# Altium PCB Tactile SW v2.0.PcbDoc
Units mm, origin at the board's own origin, x right, y up, seen from the top; angles counter-clockwise.
Board outline 17.5 x 15.4 mm, 2 copper layers (Top Layer, Bottom Layer), stack 1.569 mm thick; 8 components, 5 nets, 22 pads, 1 vias.
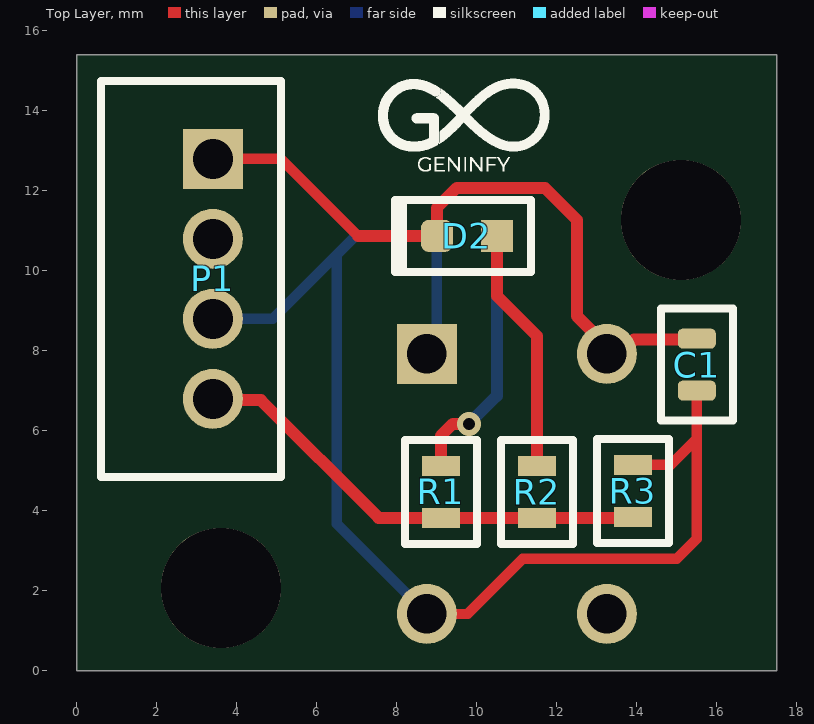
[diagram p0: Top Layer view]
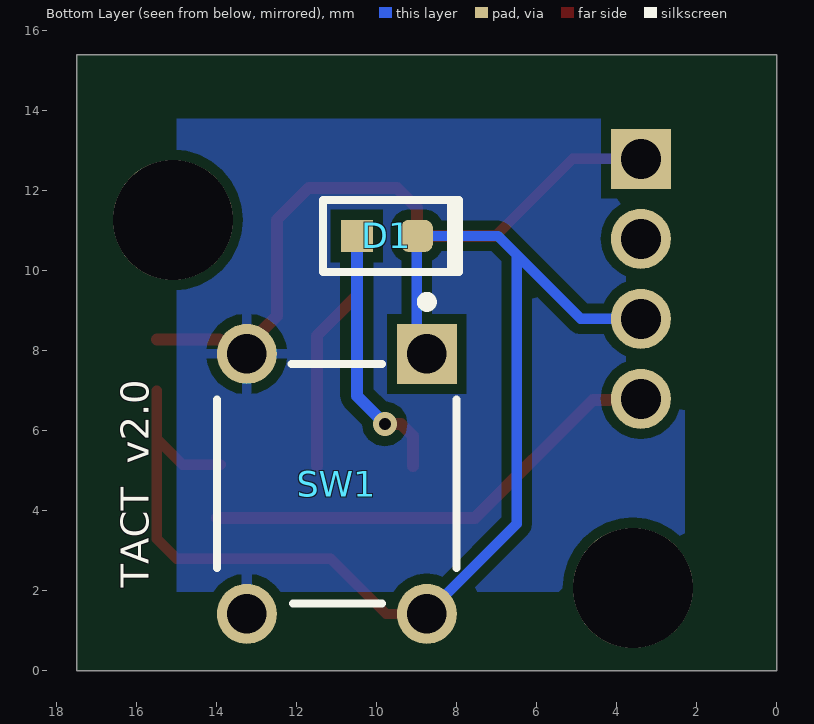
[diagram p1: Bottom Layer view, seen from below]
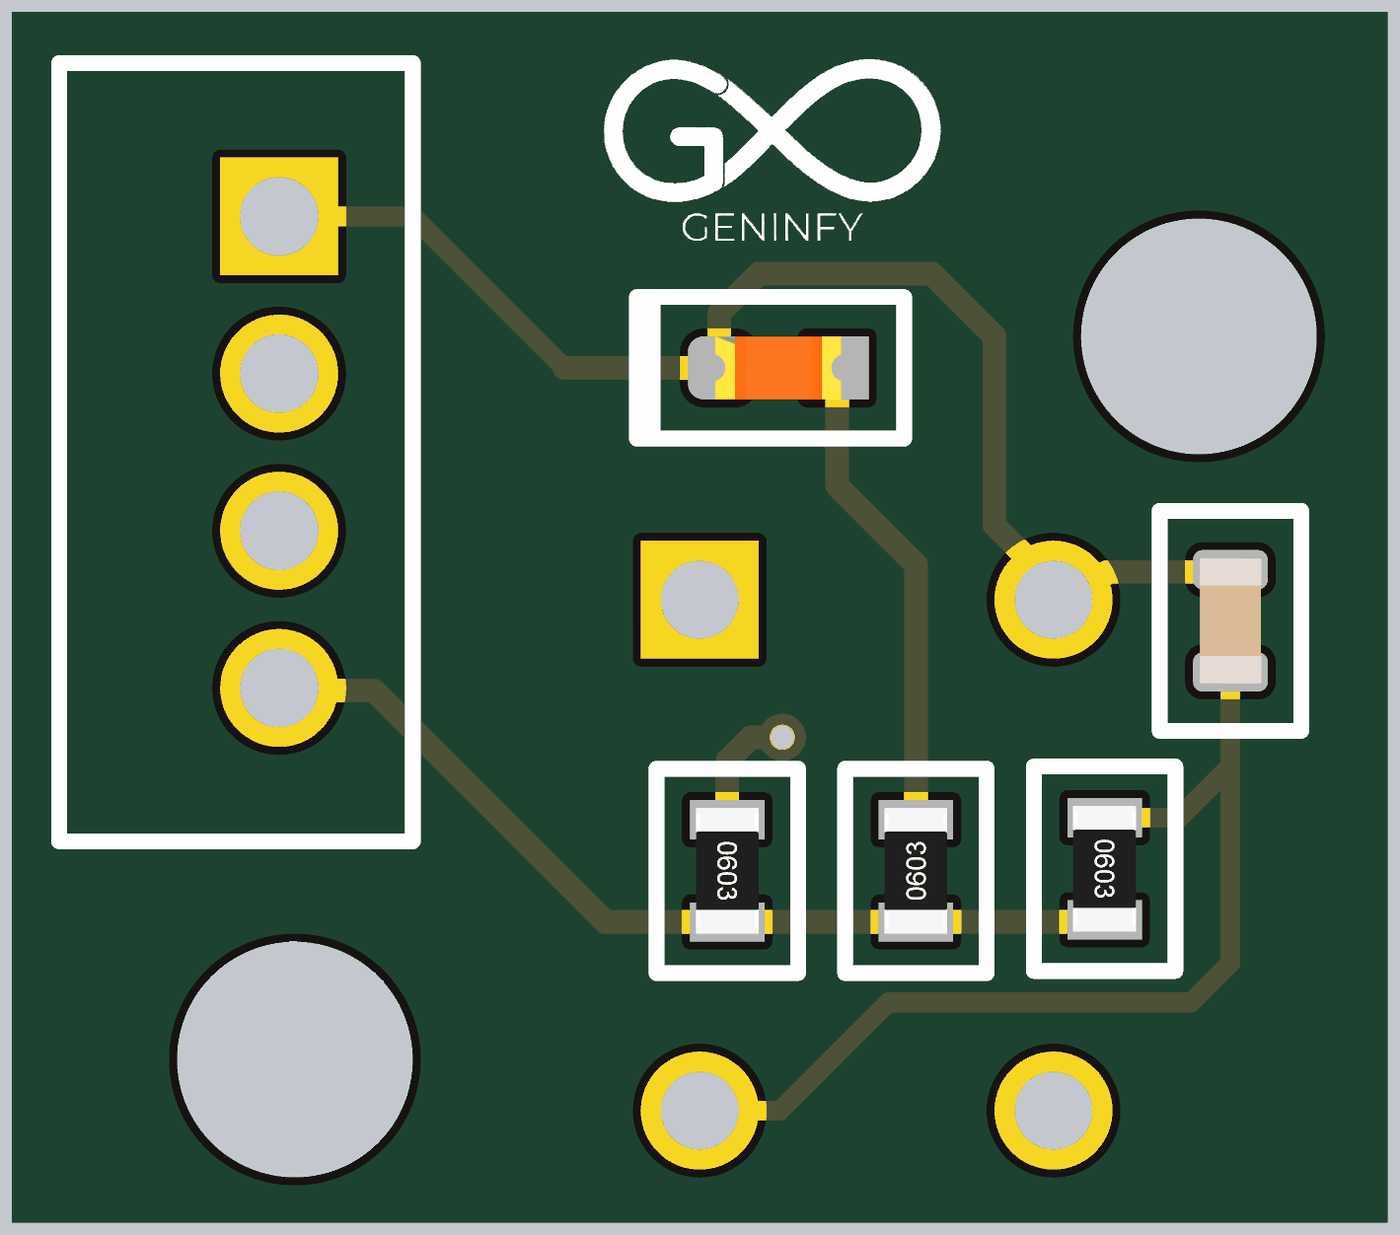
[diagram p2: 3D render of the assembled board from above, using the file's embedded part models]

## Layer stack, top to bottom
Top Solder: solder mask 0.0254, SM-001, Dk 4
Top Layer: signal copper 0.035
Dielectric 1: core 1.4986, Core-043, Dk 4.3
Bottom Layer: signal copper 0.035
Bottom Solder: solder mask 0.0254, SM-001, Dk 4

## Board outline
0,0 17.5,0 17.5,15.4 0,15.4

## Design rules (kind name [scope] priority, off if disabled: settings)
Clearance [All] p1: gap=0.254 ignorepadtopadclearanceinfootprint=FALSE except(0: Arc-Hole Track-Hole SMDPad-Hole THPad-Hole Via-Hole Fill-Hole Poly-Hole Region-Hole Text-Hole)
PolygonConnect [All] p1: connectstyle=Relief reliefconductorwidth=0.254 reliefentries=4 polygonreliefangle="90 Angle" airgapwidth=0.254
RoutingVias [All] p1: holewidth=0.711 width=1.27 viastyle="Through Hole" minholewidth=0.711 minwidth=1.27 maxholewidth=0.711 maxwidth=1.27
SolderMaskExpansion [All] p1: expansion=0.102 istentingtop=FALSE
Width [All] p1: maxlimit=1 minlimit=0.254 preferedwidth=0.254
30 further rules are at their usual default settings.

## Components (designator, comment, footprint, x,y, rotation, side; value= is the part's Value field where it differs from the comment)
C1 "0.1uF" "0.1uF 0603" 15.5,7.654 r270 top
D1 "LED - Orange" LED0603-Orange 9.75,10.873 r0 bottom
D2 "LED - Orange" LED0603-Orange 9.75,10.873 r0 top
P1 "B4B-PH-K-S(LF)(SN)" JST-B4B-PH-K-S_V 2.85,9.8 r270 top
R1 "68R" "68R 0603" 9.1,4.473 r270 top
R2 "68R" "68R 0603" 11.5,4.473 r90 top
R3 "10k" "10k R0603" 13.9,4.5 r270 top
SW1 "1825910-6" TECO-1825910-6_V 11,4.673 r270 bottom

## Footprints (in the part's own frame and the unit in brackets; to place one, negate y for a bottom-side part, rotate by r counter-clockwise, add the part's x,y. Pads: shape width x height; smd on the part's side, far side on the other; paste and mask are expansions set on the pad)
"0.1uF 0603" [mm]
  rrect50% 0.5x0.95 smd: 1(-0.65,0) 2(0.65,0)
  silkscreen extent -1.4,-0.9 1.4,0.9, body extent -0.8,-0.4 0.8,0.4, height 0.8
"10k R0603" [mm]
  rect 0.5x0.95 smd: 1(-0.65,0) 2(0.65,0)
  silkscreen extent -1.3,-0.9 1.3,0.9, body extent -0.8,-0.4 0.8,0.4, height 0.45
"68R 0603" [mm]
  rect 0.5x0.95 smd: 1(-0.65,0) 2(0.65,0)
  silkscreen extent -1.3,-0.9 1.3,0.9, body extent -0.8,-0.4 0.8,0.4, height 0.45
JST-B4B-PH-K-S_V [mm] "Connector, 4-Leads, Body 9.9x4.5mm, Pitch 2mm"
  rect 1.5x1.5 hole 1: 1(-3,0.55)
  round 1.5 hole 1: 2(-1,0.55) 3(1,0.55) 4(3,0.55)
  silkscreen extent -4.95,-2.25 4.95,2.25, body extent -4.95,-2.25 4.95,2.25, height 6
LED0603-Orange [mm]
  rrect50% 0.8x0.8 smd: 1(-0.75,0)
  rect 0.8x0.8 smd: 2(0.75,0)
  silkscreen extent -1.8,-0.9 1.6,1, body extent -0.8,-0.4 0.8,0.4, height 0.7
TECO-1825910-6_V [mm] "Switch, 4-Leads, Body 5.99x5.99mm"
  rect 1.5x1.5 hole 0.99: 1(-3.25,2.25)
  round 1.5 hole 0.99: 2(3.25,2.25) 3(-3.25,-2.25) 4(3.25,-2.25)
  silkscreen extent -4.67,-2.99 2.99,3, body extent -3,-2.99 2.99,3, height 5

## Part data
C1: library part C0603C104M4RACTU, "CAP CER 0.1UF 16V X7R 0603", Capacitance=100nF, Case Code (Imperial)=0603, Case Code (Metric)=1608, Dielectric=X7R, Dielectric Material=Ceramic, Manufacturer=KEMET, Max Operating Temperature=125°C, Min Operating Temperature=-55°C, Package Quantity=1, Supplier Part Number 1=399-1099-1-ND, Tolerance=20%, Voltage Rating=16V, Case/Package=0603, Category="Ceramic Capacitors", ComponentLink1Description=https://datasheet.ciiva.com/18102/getdatasheetpartid-66190-18102310.pdf?src-supplier=Verical, ComponentLink1URL=https://datasheet.ciiva.com/18102/getdatasheetpartid-66190-18102310.pdf?src-supplier=Verical, ComponentLink2Description=https://datasheet.ciiva.com/7823/kem-c1002-x7r-smd-7823992.pdf?src-supplier=Element14, ComponentLink2URL=https://datasheet.ciiva.com/7823/kem-c1002-x7r-smd-7823992.pdf?src-supplier=Element14, ComponentLink3Description=https://datasheet.ciiva.com/7823/kem-c1002-x7r-smd-7823993.pdf?src-supplier=Element14, ComponentLink3URL=https://datasheet.ciiva.com/7823/kem-c1002-x7r-smd-7823993.pdf?src-supplier=Element14, ComponentLink4Description=https://datasheet.ciiva.com/14589/70095383-14589450.pdf?src-supplier=Allied+Electronics, ComponentLink4URL=https://datasheet.ciiva.com/14589/70095383-14589450.pdf?src-supplier=Allied+Electronics, ComponentLink5Description=https://datasheet.ciiva.com/18192/getdatasheetpartid-302288-18192716.pdf?src-supplier=Verical, ComponentLink5URL=https://datasheet.ciiva.com/18192/getdatasheetpartid-302288-18192716.pdf?src-supplier=Verical, Depth=0.8mm, Height=0.8mm, Lead Pitch=0.7mm, Length=1.6mm, Manufacturer Part Number=C0603C104M4RACTU, Mount="Surface Mount,PCB", Number of Pins=2, Packaging="Tape and Reel", Pricing 1="1=0.10000, 10=0.03100, 50=0.01720, 100=0.01400, 500=0.01002, 1000=0.00787 (USD)", Radiation Hardening=No, REACH SVHC="No SVHC", RoHS=Yes, Stock 1=114153, Supplier 1=Digi-Key, Termination=SMD/SMT, Thickness=0.034inch, Voltage Rating (DC)=16V, Width=0.031inch
D1 D2: library part LTST-C191KFKT, "LED ORANGE CLEAR SMD", Case Code (Imperial)=0603, Case Code (Metric)=1608, Color=Orange, Forward Current=30mA, Forward Voltage=2V, Lens Color=Colorless, Manufacturer="Vishay Lite-On", Max Operating Temperature=85°C, Min Operating Temperature=-55°C, Package Quantity=1, Power Dissipation=75mW, Reverse Voltage=5V, Supplier Part Number 1=160-1445-1-ND, Test Current=20mA, Case/Package=0603, Category=LEDs, ComponentLink1Description=https://datasheet.ciiva.com/2109/ltst-c191kfkt-2109968.pdf?src-supplier=Digi-Key, ComponentLink1URL=https://datasheet.ciiva.com/2109/ltst-c191kfkt-2109968.pdf?src-supplier=Digi-Key, ComponentLink2Description=https://datasheet.ciiva.com/12400/100-ltst-c191kfkt-39904-12400811.pdf?src-supplier=Mouser, ComponentLink2URL=https://datasheet.ciiva.com/12400/100-ltst-c191kfkt-39904-12400811.pdf?src-supplier=Mouser, ComponentLink3Description=https://datasheet.ciiva.com/11775/0900766b80dc02b0-11775613.pdf?src-supplier=RSComponents, ComponentLink3URL=https://datasheet.ciiva.com/11775/0900766b80dc02b0-11775613.pdf?src-supplier=RSComponents, ComponentLink4Description=https://datasheet.ciiva.com/15201/getdatasheetpartid-631075-15201391.pdf?src-supplier=Verical, ComponentLink4URL=https://datasheet.ciiva.com/15201/getdatasheetpartid-631075-15201391.pdf?src-supplier=Verical, ComponentLink5Description=https://datasheet.ciiva.com/2109/s-110-ltst-c191kfkt-2109969.pdf?src-supplier=Digi-Key, ComponentLink5URL=https://datasheet.ciiva.com/2109/s-110-ltst-c191kfkt-2109969.pdf?src-supplier=Digi-Key, Depth=0.8mm, Dominant Wavelength=605nm, Height=0.55mm, Illumination Color=Orange, Lead Free="Lead Free", Length=1.6mm, Lens Style=Diffused,Colorless,Rectangular, Lens Transparency=Clear, Luminous Intensity=90mcd, Manufacturer Part Number=LTST-C191KFKT, Mount="Surface Mount", Number of Elements=1, Number of LEDs=1, Number of Pins=2, Packaging="Tape and Reel", Power Rating=75mW, Pricing 1="1=0.24000, 10=0.17900, 100=0.08460, 500=0.05640, 1000=0.04418, 2500=0.04324 (USD)", Radiation Hardening=No, RoHS=Yes, Stock 1=92562, Supplier 1=Digi-Key, Viewing Angle=130°, Wavelength=611nm, Width=0.8mm
P1: library part CMP-2000-05165-1, "Male Header, Pitch 2 mm, 1 x 4 Position, Height 6 mm, Tail Length 3.4 mm, -25 to 85 degC, RoHS, Bulk", Manufacturer=JST, Datasheet URL=http://datasheet.octopart.com/B4B-PH-K-S%28LF%29%28SN%29-JST-datasheet-10558886.pdf, Datasheet Version=Apr-09, Manufacturer URL=http://www.jst.com/home2.html, No of Positions=4, Pitch=2mm, Style/Orientation=StraightHeader/Plug, Termination=Crimp, Type=ShroudedHeader
R1 R2: library part CRGP0603F68R, "CRGP 0603 68R 1%", Case Code (Imperial)=0603, Case Code (Metric)=1608, Manufacturer="TE Connectivity", Max Operating Temperature=155°C, Max Power Dissipation=250mW, Min Operating Temperature=-55°C, Resistor Type="Thick Film", Supplier Part Number 1=A130402CT-ND, Temperature Coefficient=200ppm/°C, Tolerance=1%, Case/Package=0603, Category="Chip SMD Resistors", ComponentLink1Description=https://www.te.com/commerce/DocumentDelivery/DDEController?Action=srchrtrv&amp;DocNm=9-1773463-9&amp;DocType=DS&amp;DocLang=English&src-supplier=Digi-Key, ComponentLink1URL=https://www.te.com/commerce/DocumentDelivery/DDEController?Action=srchrtrv&amp;DocNm=9-1773463-9&amp;DocType=DS&amp;DocLang=English&src-supplier=Digi-Key, Manufacturer Part Number=CRGP0603F68R, Number of Terminations=2, Packaging="Tape and Reel", Pricing 1="1=0.14000, 10=0.11400, 100=0.04470, 1000=0.01870, 2500=0.01714 (USD)", Resistance=68R, RoHS=No, Stock 1=49308, Supplier 1=Digi-Key
R3: library part CRG0603F10K/10, "RES 10.0K OHM 1/10W 1% 0603", Case Code (Imperial)=0603, Manufacturer="TE Connectivity", Max Operating Temperature=125°C, Max Power Dissipation=100mW, Min Operating Temperature=-55°C, Number of Resistors=1, Package Quantity=10000, Resistance=10kR, Resistor Type="Thick Film", Supplier Part Number 1=A121523CT-ND, Temperature Coefficient=100ppm/°C, Tolerance=1%, Voltage Rating=50V, Case/Package=0603, Category="Chip SMD Resistors", ComponentLink1Description=https://datasheet.ciiva.com/2530/eng-cd-1622829-ba-2530062.pdf?src-supplier=Digi-Key, ComponentLink1URL=https://datasheet.ciiva.com/2530/eng-cd-1622829-ba-2530062.pdf?src-supplier=Digi-Key, Depth=0.8mm, ELV=Compliant, Height=0.022inch, Length=1.6mm, Manufacturer Part Number=CRG0603F10K/10, Military Standard=Not, Mount="Surface Mount", Number of Terminations=2, Packaging="Tape and Reel", Power Rating=100mW, Pricing 1="1=0.10000, 10=0.03100, 100=0.01270, 1000=0.00570, 2500=0.00494, 5000=0.00409 (USD)", Radiation Hardening=No, RoHS=Yes, Stock 1=172089, Supplier 1=Digi-Key, Termination=Solder, Weight=7.1E-05oz, Width=0.8mm
SW1: library part CMP-1684-00021-1, "Tact Switch, SPST-NO, 0.05 A, -35 to 85 degC, 4-Pin THD, RoHS, Bulk", Actuator Color=Black, Contact Rating @ Voltage=0.05A@24VDC, Dielectric Strength=500VAC, Manufacturer="TE Connectivity", Maximum AC Voltage Rating=N/A, Maximum Contact Resistance=100mOhm, Maximum DC Voltage Rating=24V, Minimum Insulation Resistance=100MOhm, Operating Temperature=-35to85C, Package Description="4-Pin Through Hole Device, Body 5.99 x 5.99 mm, Pitch 6.5 mm", Package Reference=THD, Actuator Length=1.4mm, Actuator Material=PolybutyleneTerephthalate, Actuator Style=RoundButton, Base Material=N/A, Body Orientation=Straight, Bushing Type=Unthreaded, Contact Material=CopperAlloy, Contact Plating=Silver, Datasheet URL=http://www.te.com/commerce/DocumentDelivery/DDEController?Action=showdoc&DocId=Customer+Drawing%7F1825910%7FC9%7Fpdf%7FEnglish%7FENG_CD_1825910_C9.pdf%7F1825910-6, Datasheet Version="Rev. C9", Dimension=5.99x5mm, Electrical Life=100000Cycles, Family=1825910, Function=MomentaryContact, Housing Material=N/A, Illumination=N/R, Manufacturer URL=http://www.te.com, Mechanical Life=100000Cycles, Mounting=ThroughHole, Packaging=N/A, Part No=1825910-6, Pole Throw Configuration=SPST, Product Weight=N/A, RoHS=Yes, Seal Description=N/A, Seal Location=N/A, Switch Configuration=OFF(ON), Terminal Type=PCPins, Thread Size=N/R

## Free pads (board coordinates)
  round 3 hole 3 unplated: ""(3.6,2.073) ""(15.1,11.273)

## Via types
v1: diameter 0.6, hole 0.3, Top Layer to Bottom Layer, tented both sides, 1 vias

## Nets (pads, with @x,y where several pads share a name; then routed paths per layer and width w, separated by ;. In a path a pad name is that pad's centre, name@x,y a point inside that pad or via, vN(x,y) a via of type N, cw(c..) or ccw(c..) an arc to the next point about the centre after c; other vN are vias at no path point)
+3V3: P1.4 R1.2 R2.1 R3.2 | length 11.8
  Top Layer w0.3: P1.4 3.431,6.769 4.6,6.769 7.546,3.823 R1.2 R2.1 R3.2@14,3.823
GND: C1.1 D2.1 P1.1 SW1.3 SW1.4 | length 17.2
  Top Layer w0.254: P1.1 5.1,12.8 7.027,10.873
  Top Layer w0.3: 7.027,10.873 D2.1 9,11.573 9.5,12.073 11.7,12.073 12.5,11.273 12.5,8.87 13.25,8.12 SW1.3 13.575,7.923 13.929,8.277 C1.1@15.5,8.277
NetC1_2: C1.2 D1.1 P1.3 R3.1 SW1.1 SW1.2 | length 32.5
  Top Layer w0.254: SW1.2 9.772,1.423 11.149,2.8 15,2.8 15.5,3.3 15.5,5.8 ; R3.1 14.85,5.15 15.5,5.8 ; C1.2 15.5,5.8
  Bottom Layer w0.254: P1.3 4.9,8.8 6.5,10.4 ; SW1.2 6.5,3.673 6.5,10.4 ; SW1.1 9,8.173 D1.1 6.973,10.873 6.5,10.4
NetD1_2: D1.2 R1.1 | length 6.6
  Top Layer w0.3: R1.1 9.1,5.873 9.4,6.173 v1(9.8,6.173)
  Bottom Layer w0.3: v1(9.8,6.173) 10.5,6.873 D1.2
NetD2_2: D2.2 R2.2 | length 6.2
  Top Layer w0.3: D2.2 10.5,9.373 11.5,8.373 R2.2
pads on no net: P1.2

## Polygon pours and split planes (outlines as drawn)
GND on Bottom Layer "GND_L02_P000" (solid, pour order 0): 2.3,3.373 2.3,13.8 12.6,13.8 15,13.8 15,11.173 15,1.973 3.7,1.973

## Silkscreen, mask and mechanical layers (free items; w line width, h text height)
Top Overlay:
  drawing of 9 lines, arcs and shapes, not listed
Bottom Overlay:
  text "v2.0" at 15.7,5.173 h0.7 r270
  text "TACT" at 15.7,2.073 h0.7 r270